# Altium PCB Nut-nhan.PcbDoc
Units mm, origin at the board's own origin, x right, y up, seen from the top; angles counter-clockwise.
Board outline 34.29 x 65.66 mm, 2 copper layers (Top Layer, Bottom Layer); 9 components, 6 nets, 30 pads, 0 vias.
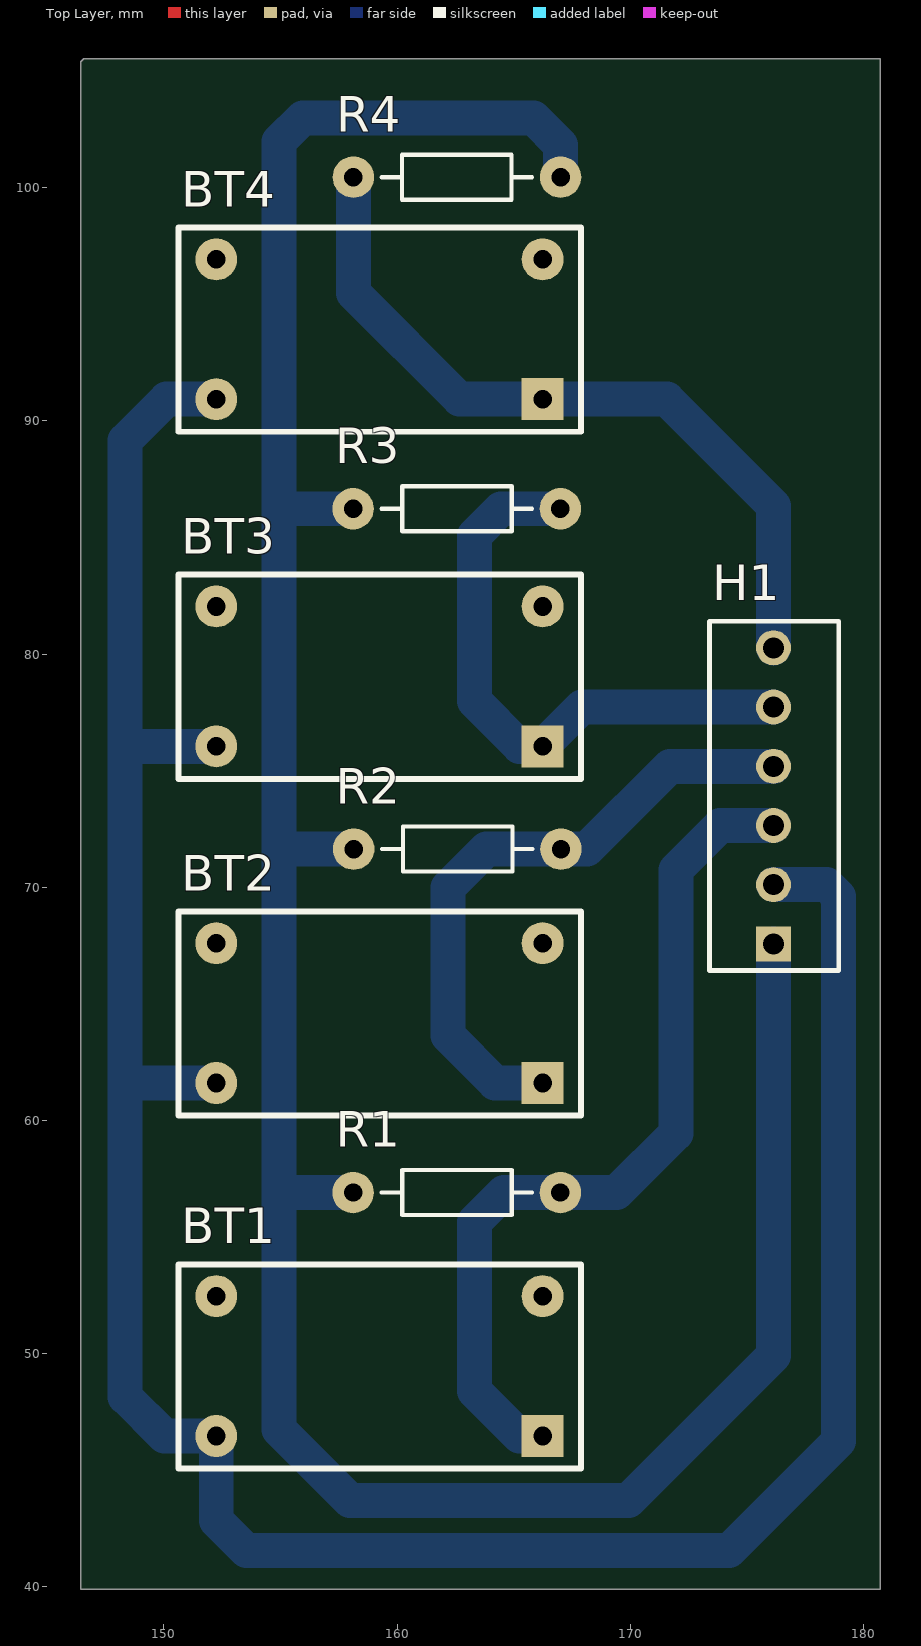
[diagram p0: Top Layer view]
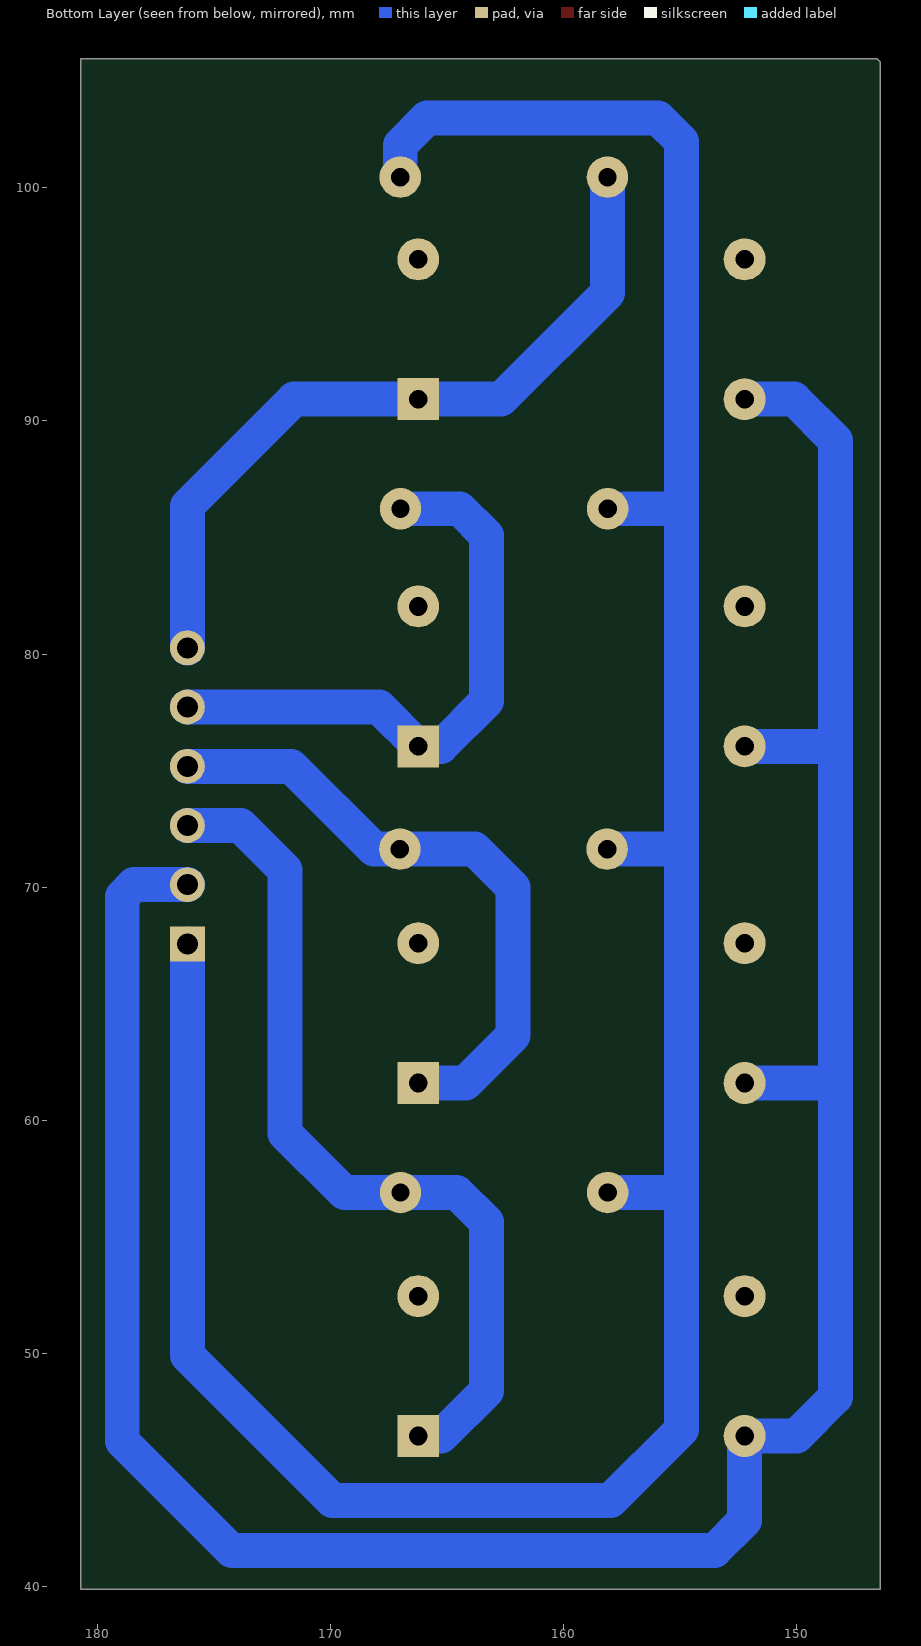
[diagram p1: Bottom Layer view, seen from below]
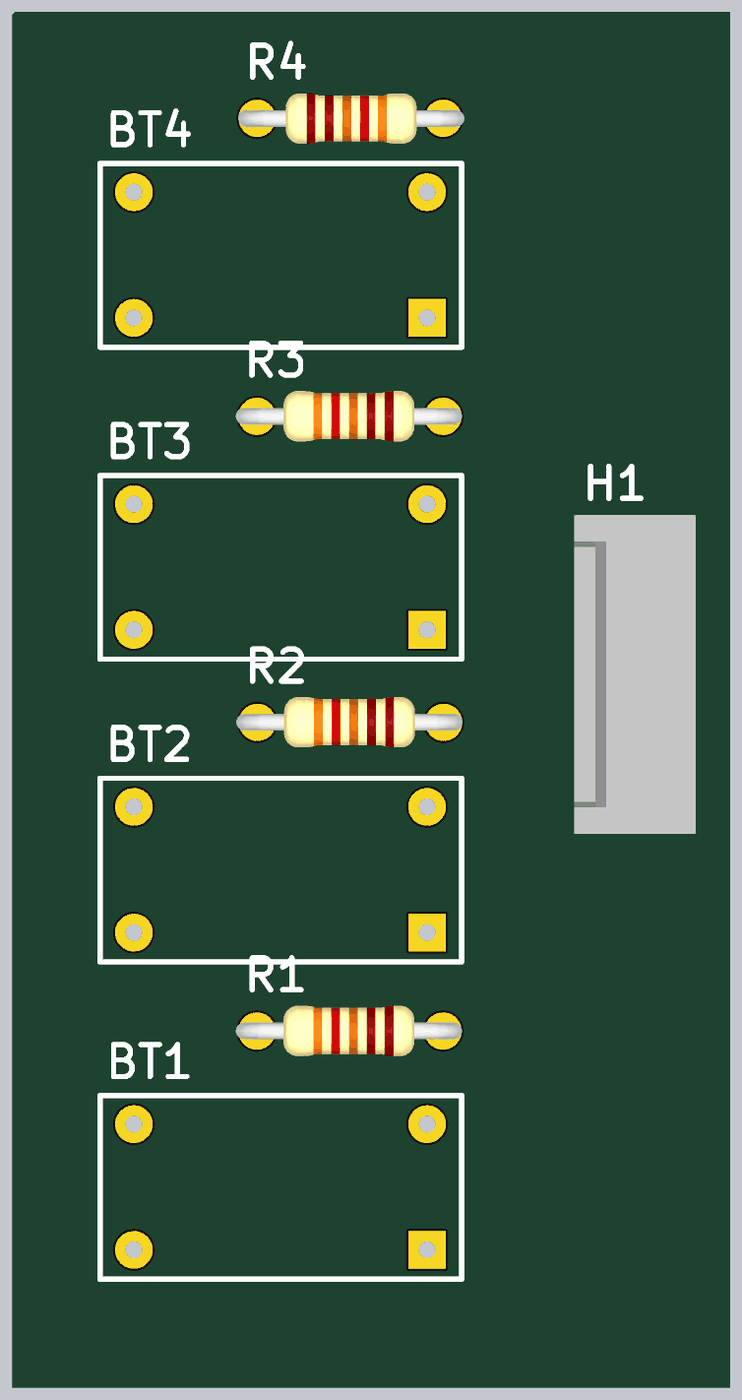
[diagram p2: 3D render of the assembled board from above, using the file's embedded part models]

## Layer stack, top to bottom
Top Solder: solder mask 0.0102, Solder Resist, Dk 3.5
Top Layer: signal copper 0.0356
Dielectric 1: dielectric 0.32, FR-4, Dk 4.8
Bottom Layer: signal copper 0.0356
Bottom Solder: solder mask 0.0102, Solder Resist, Dk 3.5

## Board outline
146.431,105.41 146.431,39.878 180.721,39.878 180.721,105.537 146.558,105.537

## Design rules (kind name [scope] priority, off if disabled: settings)
Clearance [All] p1: gap=0.5 ignorepadtopadclearanceinfootprint=FALSE
PolygonConnect [All] p1: connectstyle=Relief reliefconductorwidth=0.254 reliefentries=4 polygonreliefangle="90 Angle" airgapwidth=0.254
RoomDefinition Nut-nhan [InComponentClass('Nut-nhan')] p1: confinementstyle=ConfineIn formatcopy=TRUE lockcomponents=FALSE outline 0,0 50.8,0 50.8,25.4 0,25.4
RoutingVias [All] p1: holewidth=0.711 width=1.27 viastyle="Through Hole" minholewidth=0.711 minwidth=1.27 maxholewidth=0.711 maxwidth=1.27
SolderMaskExpansion [All] p1: expansion=0.102
Width [All] p1: maxlimit=1.75 minlimit=1.25 preferedwidth=1.5
30 further rules are at their usual default settings.

## Components (designator, comment, footprint, x,y, rotation, side; value= is the part's Value field where it differs from the comment)
BT1 "BUTTON" BUTTON4 166.243,46.451 r180 top
BT2 "BUTTON" BUTTON4 166.243,61.595 r180 top
BT3 "BUTTON" BUTTON4 166.243,76.042 r180 top
BT4 "BUTTON" BUTTON4 166.243,90.932 r180 top
H1 "Header6" HDR6 176.149,67.564 r90 top
R1 "1k" R1/4W 158.115,56.896 r0 top value="R1/4W - 1K"
R2 "1k" R1/4W 158.14,71.628 r0 top value="R1/4W - 1K"
R3 "1k" R1/4W 158.115,86.233 r0 top value="R1/4W - 1K"
R4 "1k" R1/4W 167.015,100.457 r180 top value="R1/4W - 1K"

## Footprints (in the part's own frame and the unit in brackets; to place one, negate y for a bottom-side part, rotate by r counter-clockwise, add the part's x,y. Pads: shape width x height; smd on the part's side, far side on the other; paste and mask are expansions set on the pad)
BUTTON4 [mm]
  rect 1.8x1.8 hole 0.8: 1(0,0)
  round 1.8 hole 0.8: 2(0,-6) 3(14,-6) 4(14,0)
  silkscreen extent -1.65,-7.37 15.62,1.4, body extent -1.65,-7.37 15.62,1.4, height 1
HDR6 [mm] "Connector; Header; 6 Position"
  rect 1.5x1.5 hole 0.9: 1(0,0)
  round 1.5 hole 0.9: 2(2.54,0) 3(5.08,0) 4(7.62,0) 5(10.16,0) 6(12.7,0)
  silkscreen extent -1.14,-2.79 13.84,2.74, body extent -1.27,-2.92 13.97,2.88, height 11.72
R1/4W [mil] "R 1/4W, 2 Pin, 350mil"
  round 70 hole 31: 1(0,0) 2(350,0)
  silkscreen extent 48,-38 302,38, body extent -40,-47 386,47, height 111

## Part data
BT1 BT2 BT3 BT4: library part BUTTON4
H1: "Header IDC, 6 x 1 Pin Vertical 2.54mm Pitch (Non-Boxed, Male)"
R1 R2 R3 R4: library part R1/4W, "Resistor 1/4W"

## Nets (pads, with @x,y where several pads share a name; then routed paths per layer and width w, separated by ;. In a path a pad name is that pad's centre, name@x,y a point inside that pad or via, vN(x,y) a via of type N, cw(c..) or ccw(c..) an arc to the next point about the centre after c; other vN are vias at no path point)
BT1: BT1.1 H1.3 R1.2 | length 37.5
  Bottom Layer w1.5: BT1.1 165.258,46.451 163.322,48.387 163.322,55.626 164.592,56.896 R1.2 169.418,56.896 171.958,59.436 171.958,70.739 173.863,72.644 H1.3
BT2: BT2.1 H1.4 R2.2 | length 27.4
  Bottom Layer w1.5: BT2.1 164.211,61.595 162.179,63.627 162.179,69.977 163.83,71.628 R2.2 168.148,71.628 171.704,75.184 H1.4
BT3: BT3.1 H1.5 R3.2 | length 25.6
  Bottom Layer w1.5: R3.2 164.465,86.233 163.322,85.09 163.322,77.978 165.258,76.042 BT3.1 167.925,77.724 H1.5
BT4: BT4.1 H1.6 R4.2 | length 32.9
  Bottom Layer w1.5: R4.2 158.125,95.494 162.687,90.932 BT4.1 171.577,90.932 176.149,86.36 H1.6
GND: BT1.4 BT2.4 BT3.4 BT4.4 H1.2 | length 117.4
  Bottom Layer w1.5: BT2.4 148.463,61.595 148.336,61.722 ; BT3.4 148.494,76.042 148.336,76.2 ; BT4.4 150.114,90.932 148.336,89.154 148.336,76.2 ; H1.2 178.435,70.104 178.943,69.596 178.943,46.228 174.244,41.529 153.543,41.529 152.243,42.829 BT1.4 150.018,46.451 148.336,48.133 148.336,61.722 ; 148.336,61.722 148.336,76.2
VCC: H1.1 R1.1 R2.1 R3.1 R4.1 | length 121.9
  Bottom Layer w1.5: R1.1 154.94,56.896 ; R3.1 154.94,86.233 ; R2.1 155.067,71.628 154.94,71.501 ; R4.1 167.015,101.844 165.862,102.997 155.956,102.997 154.94,101.981 154.94,86.233 ; H1.1 176.149,49.911 169.926,43.688 157.988,43.688 154.94,46.736 154.94,56.896 ; 154.94,56.896 154.94,71.501 ; 154.94,71.501 154.94,86.233
pads on no net: BT1.2 BT1.3 BT2.2 BT2.3 BT3.2 BT3.3 BT4.2 BT4.3